# EAGLE board untitleda (EAGLE 8.3.1)
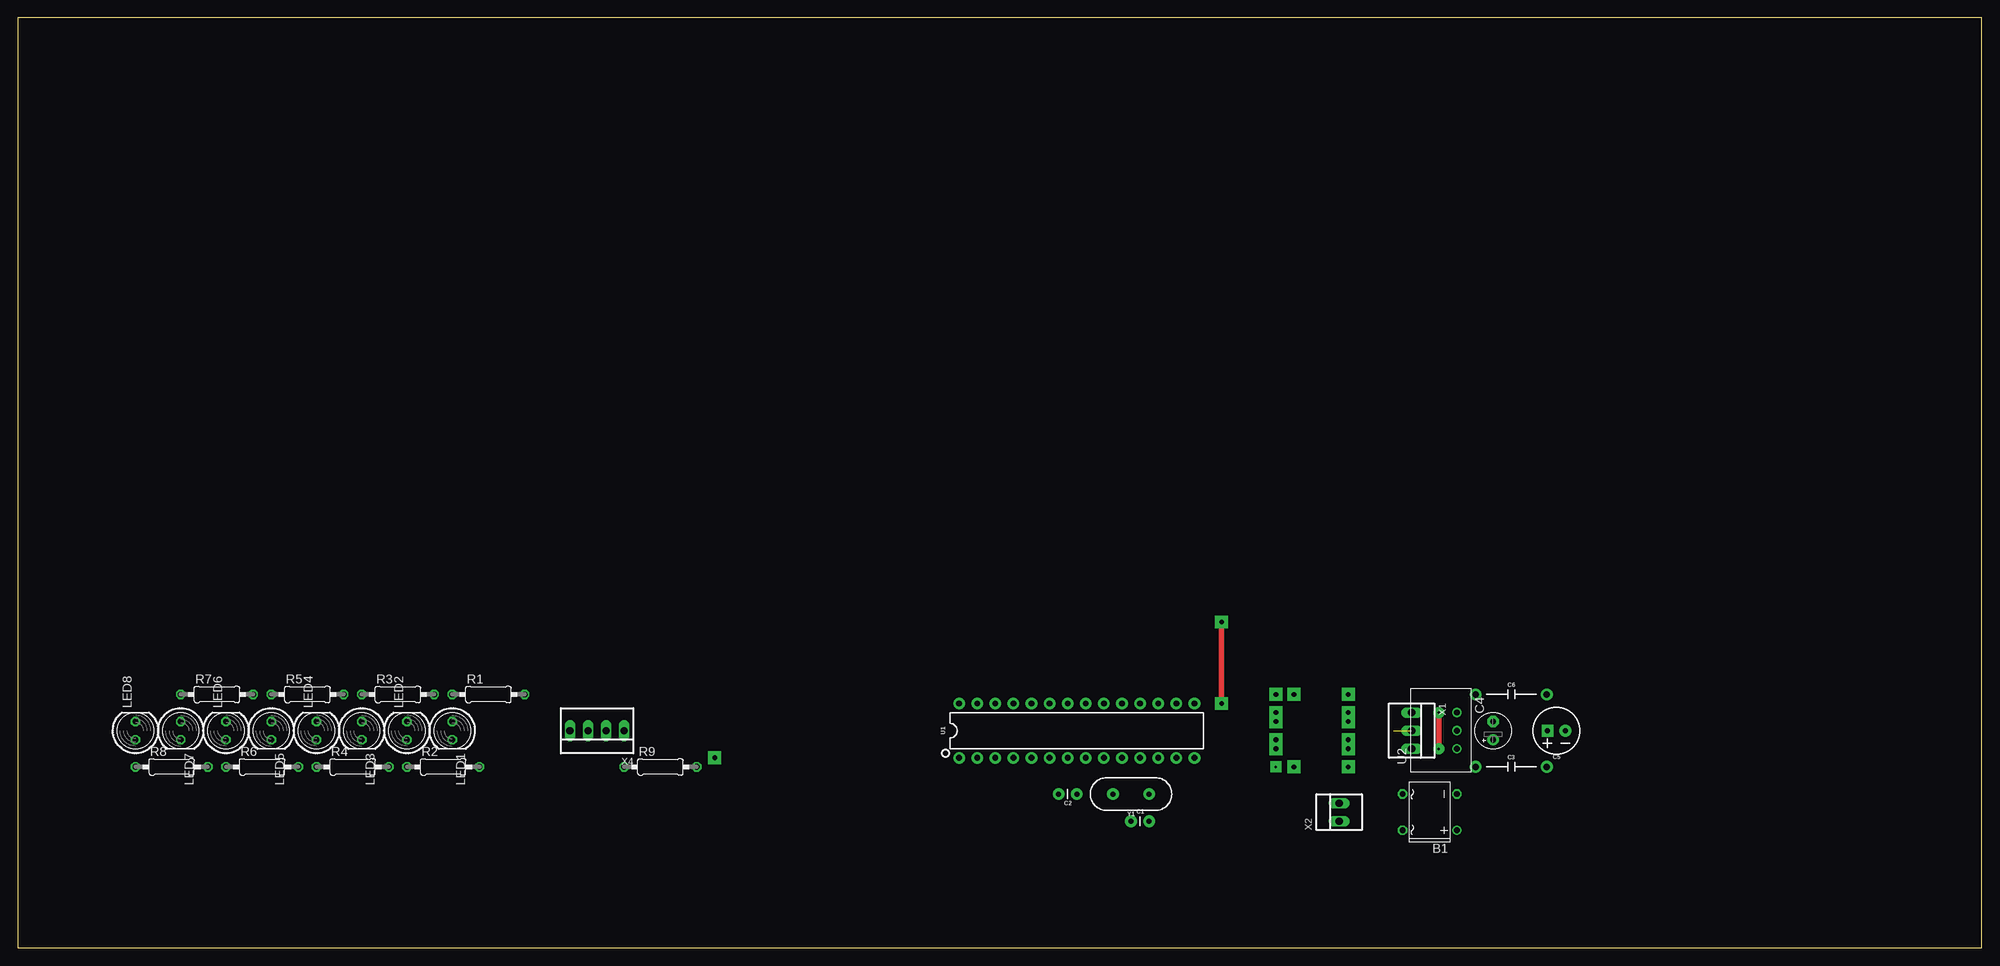
[diagram p0: board, top side]
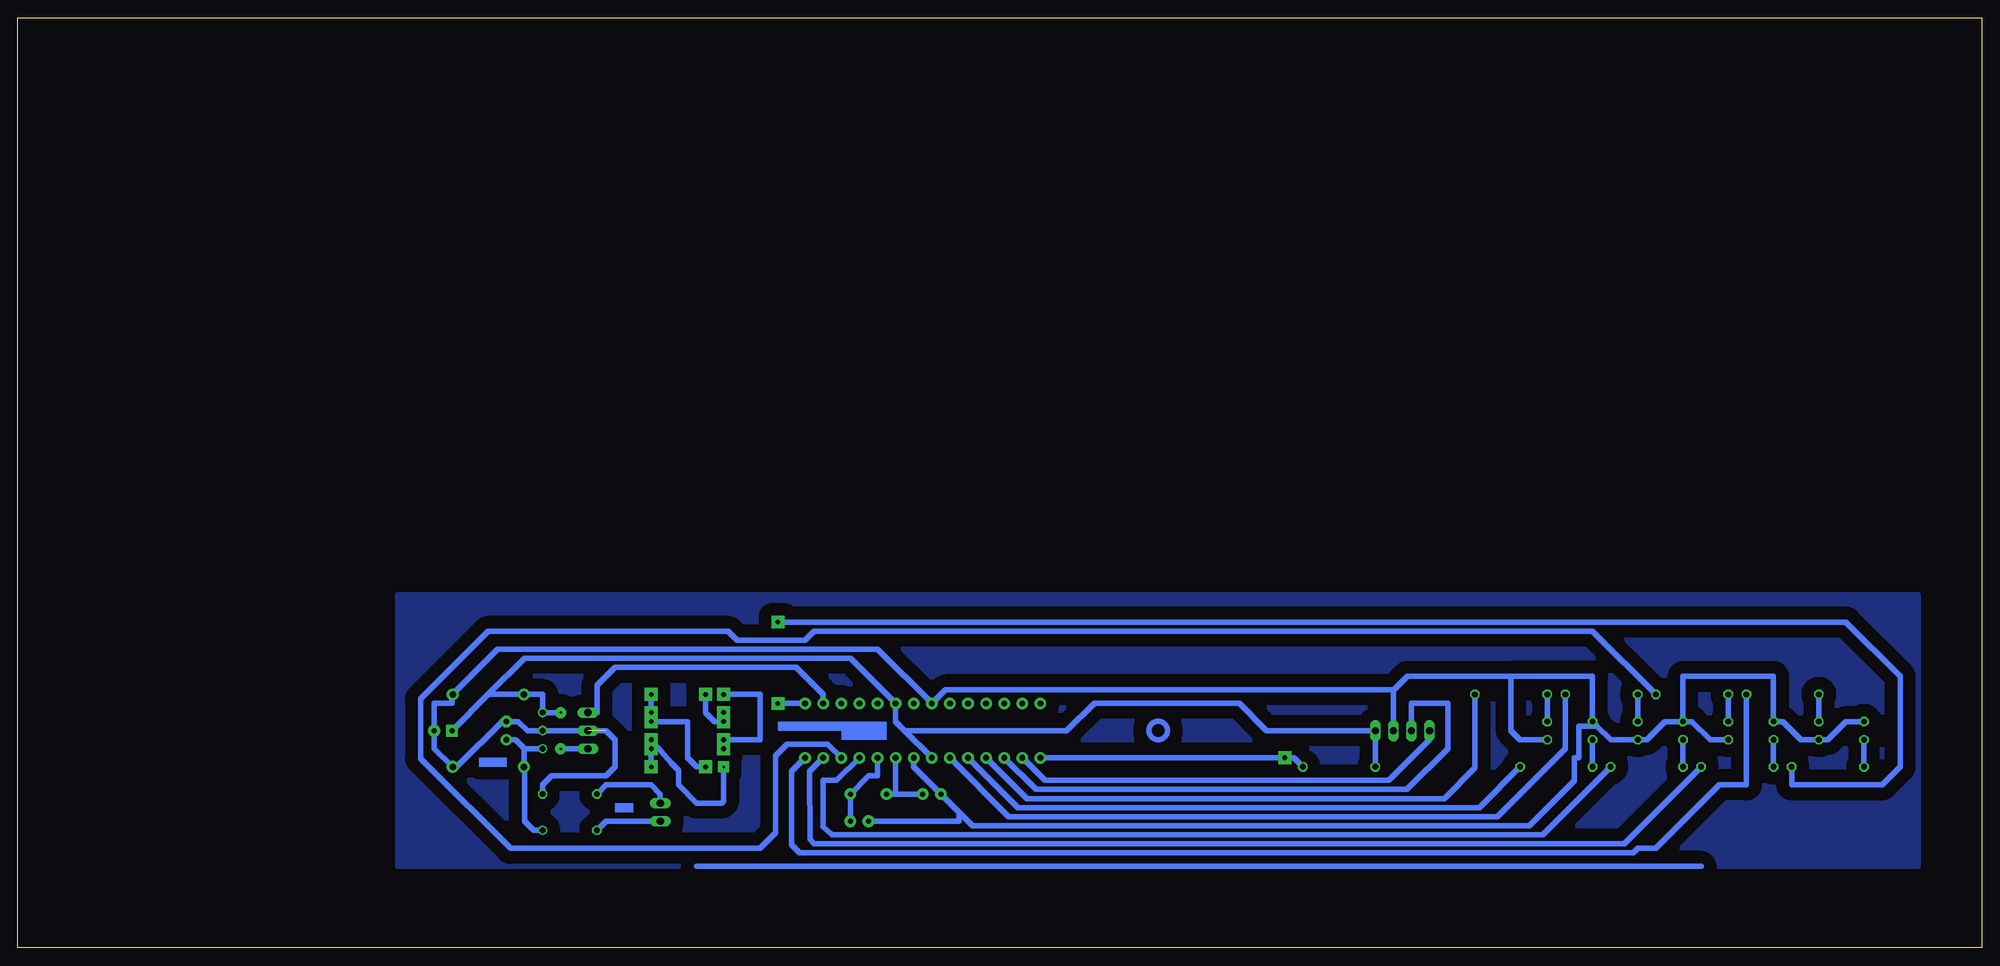
[diagram p1: board, bottom side, seen from below]

Size 275.57 x 130.48 mm. Coordinates in mm from the lower left corner, seen from the top.
Outline: 0,0 275.57,0 275.57,130.48 0,130.48 0,0
Copper layers (1*16): Top 0.035mm / dielectric 1.5mm / Bottom 0.035mm
Design rules "default *": minimum track width 30mil, minimum drill 0.35mm, track to track 20mil, track to pad 6mil, pad to pad 6mil, via to via 6mil, smd to smd 6mil, copper to edge 40mil, drill to drill 6mil, minimum pad ring 10mil, minimum via ring 8mil, stop-mask expansion 4mil, vias tented up to drill 0mil, thermal gap 10mil

## Footprints (pad centres in the part's own frame; a part is rotated, then mirrored left to right if it is on the bottom)
DB = drill 0.813: + -2.54,-3.81 | drill 0.813 octagon: - 2.54,-3.81; AC1 2.54,3.81; AC2 -2.54,3.81
CAP-PTH-2.54 = drill 0.7 pad 1.651: 1 -1.27,0; 2 1.27,0
CAP-PTH-10MM = drill 0.9 pad 1.651: 1 -5,0; 2 5,0
E2,5-5 = drill 0.813 pad 1.6: + -1.27,0 | drill 0.813 pad 1.6 octagon: - 1.27,0
CPOL-RADIAL-2.5MM-6.5MM = drill 0.7 pad 1.651 square: 1 1.25,0 | drill 0.7 pad 1.651: 2 -1.25,0
LED5MM = drill 0.813 octagon: A -1.27,0; K 1.27,0
0207/10 = drill 0.813 octagon: 1 -5.08,0; 2 5.08,0
DIP28 = drill 0.813 pad 1.626: 1 -16.51,-3.81; 2 -13.97,-3.81; 3 -11.43,-3.81; 4 -8.89,-3.81; 5 -6.35,-3.81; 6 -3.81,-3.81; 7 -1.27,-3.81; 8 1.27,-3.81; 9 3.81,-3.81; 10 6.35,-3.81; 11 8.89,-3.81; 12 11.43,-3.81; 13 13.97,-3.81; 14 16.51,-3.81; 15 16.51,3.81; 16 13.97,3.81; 17 11.43,3.81; 18 8.89,3.81; 19 6.35,3.81; 20 3.81,3.81; 21 1.27,3.81; 22 -1.27,3.81; 23 -3.81,3.81; 24 -6.35,3.81; 25 -8.89,3.81; 26 -11.43,3.81; 27 -13.97,3.81; 28 -16.51,3.81
DC-DC_CONVERTER_78XX = drill 0.8: GND 0,0; VIN -2.54,0; VOUT 2.54,0
22-23-2031 = drill 1 long: 1 -2.54,0; 2 0,0; 3 2.54,0
22-23-2021 = drill 1 long: 1 -1.27,0; 2 1.27,0
22-23-2041 = drill 1 long: 1 -3.81,0; 2 -1.27,0; 3 1.27,0; 4 3.81,0
HC49US = drill 0.7 pad 1.651: 1 -2.54,0; 2 2.54,0

## Placement (x,y rotation side)
B1  DBDB107G  [DB]  198.12,19.05 90 top
C1  22pF  [CAP-PTH-2.54]  157.48,17.78 0 top
C2  22pF  [CAP-PTH-2.54]  147.32,21.59 180 top
C3  10nF  [CAP-PTH-10MM]  209.55,25.4 0 top
C4  [E2,5-5]  207.01,30.48 90 top
C5  100uF  [CPOL-RADIAL-2.5MM-6.5MM]  215.9,30.48 180 top
C6  10nF  [CAP-PTH-10MM]  209.55,35.56 0 top
LED1  [LED5MM]  60.96,30.48 270 top
LED2  [LED5MM]  54.61,30.48 90 top
LED3  [LED5MM]  48.26,30.48 270 top
LED4  [LED5MM]  41.91,30.48 90 top
LED5  [LED5MM]  35.56,30.48 270 top
LED6  [LED5MM]  29.21,30.48 90 top
LED7  [LED5MM]  22.86,30.48 270 top
LED8  [LED5MM]  16.51,30.48 90 top
R1  [0207/10]  66.04,35.56 0 top
R2  [0207/10]  59.69,25.4 0 top
R3  [0207/10]  53.34,35.56 0 top
R4  [0207/10]  46.99,25.4 0 top
R5  [0207/10]  40.64,35.56 0 top
R6  [0207/10]  34.29,25.4 0 top
R7  [0207/10]  27.94,35.56 0 top
R8  [0207/10]  21.59,25.4 0 top
R9  [0207/10]  90.17,25.4 0 top
U1  328P  [DIP28]  148.59,30.48 0 top
U2  R-78E5.0-1.0  [DC-DC_CONVERTER_78XX]  201.93,30.48 90 top
X1  22-23-2031  [22-23-2031]  195.58,30.48 270 top
X2  22-23-2021  [22-23-2021]  185.42,19.05 90 top
X4  22-23-2041  [22-23-2041]  81.28,30.48 180 top
Y1  16MHz  [HC49US]  156.21,21.59 180 top

## Library data of the parts
B1 = rectifier
C1 C2 = SparkFun-Capacitors; PROD_ID: CAP-09128
C3 C6 = SparkFun-Capacitors; PROD_ID: CAP-09321
C4 R1-R9 = resistor
C5 = SparkFun-Capacitors; PROD_ID: CAP-08439
LED1-LED8 = led
U1 = SparkFun-IC-Microcontroller; PROD_ID: IC-09136
U2 = SparkFun-IC-Power; PROD_ID: COM-13655
X1 = con-molex; MF: MOLEX; MPN: 22-23-2031; OC_FARNELL: 1462950; OC_NEWARK: 30C0862
X2 = con-molex; MF: MOLEX; MPN: 22-23-2021; OC_FARNELL: 1462926; OC_NEWARK: 25C3832
X4 = con-molex; MF: MOLEX; MPN: 22-23-2041; OC_FARNELL: 1462920; OC_NEWARK: 38C0355
Y1 = SparkFun-Clocks; PROD_ID: XTAL-08181; SF_ID: COM-00536

## Nets
2: R1.2 U1.4
3: R2.2 U1.5
4: R3.2 U1.6
5: R4.2 U1.11
5V: C5.1 C6.1 R9.1 U1.7 U1.20 U2.VOUT X1.3 X4.1
6: R5.2 U1.12
7: R6.2 U1.13
8: R7.2 U1.14
9: R8.2 U1.15
N$1: LED1.A R1.1
N$2: LED2.A R2.1
N$3: LED3.A R3.1
N$4: LED4.A R4.1
N$5: LED5.A R5.1
N$6: LED6.A R6.1
N$7: LED7.A R7.1
N$8: LED8.A R8.1
N$9: C1.2 U1.10 Y1.1
N$10: B1.+ C3.1 C4.+ U2.VIN
N$11: B1.AC2 X2.1
N$12: U1.2 X4.4
N$13: U1.3 X4.3
N$14: B1.AC1 X2.2
N$15: R9.2 U1.1
N$16: B1.- C1.1 C2.2 C3.2 C4.- C5.2 C6.2 LED1.K LED2.K LED3.K LED4.K LED5.K LED6.K LED7.K LED8.K U1.8 U1.22 U2.GND X1.2 X4.2
N$21: U1.16 X1.1
N$23: C2.1 U1.9 Y1.2

## Tracks (layer width: path | path; a pad name or v marks a point on that pad's centre or on a via)
2
  Bottom 0.762: U1.4 133.98,20.95 75.41,20.95 71.12,25.24 R1.2
3
  Bottom 0.762: R2.2 70.48,19.69 135.25,19.69 U1.5
4
  Bottom 0.762: U1.6 136.52,18.41 67.94,18.41 58.42,27.94 R3.2
5
  Bottom 0.762: R4.2 61.59,15.88 161.29,15.88 162.55,17 162.56,23.5 160.66,23.5 U1.11
5V  (via drill 0.35 pad 1.55)
  Top 0.762: v199.39,33.02 v199.39,27.94
  Bottom 0.762: 209.55,35.56 214.63,30.48 C5.1 | 209.55,35.56 C6.1 201.93,35.56 U2.VOUT v199.39,33.02 | R9.1 X4.1 100.33,30.48 104.14,34.29 124.46,34.29 128.41,30.48 151.15,30.5 | 151.15,30.5 152.4,31.75 U1.20 158.75,40.64 204.47,40.64 209.55,35.56 | U1.7 151.15,30.5 | X1.3 v199.39,27.94
6
  Bottom 0.762: U1.12 161.92,28.57 167.64,28.57 169.23,26.99 169.23,16.19 171.45,13.97 206.45,13.97 218.28,25.8 219.07,26.57 219.07,34.92 209.59,44.41 175.88,44.41 174.66,43.18 165.1,43.18 163.83,44.45 54.61,44.45 R5.2
7
  Bottom 0.762: R6.2 50.16,14.61 163.83,14.61 164.44,15.21 164.47,24.77 U1.13
8
  Bottom 0.762: R7.2 33.02,22.86 36.83,22.86 45.72,13.97 48.26,13.97 48.89,13.34 165.86,13.34 167.01,14.48 167.01,24.77 U1.14
9  (via drill 0.65 pad 1.81)
  Top 0.762: v168.91,45.72 v168.91,34.29
  Bottom 0.762: R8.2 26.67,22.86 13.97,22.86 11.43,25.4 11.43,38.1 19.05,45.72 v168.91,45.72 | U1.15 v168.91,34.29
N$1
  Bottom 0.762: R1.1 LED1.A
N$2
  Bottom 0.762: LED2.A R2.1
N$3
  Bottom 0.762: R3.1 LED3.A
N$4
  Bottom 0.762: LED4.A R4.1
N$5
  Bottom 0.762: R5.1 LED5.A
N$6
  Bottom 0.762: LED6.A R6.1
N$7
  Bottom 0.762: R7.1 LED7.A
N$8
  Bottom 0.762: LED8.A R8.1
N$9
  Bottom 0.762: C1.2 Y1.1 156.21,24.13 154.94,24.13 U1.10
N$10
  Bottom 0.762: U2.VIN 204.47,27.94 204.51,27.98 | 204.51,27.98 205.74,29.21 C4.+ | 204.51,27.98 204.55,27.94 C3.1 204.47,25.32 204.47,17.78 203.2,16.51 B1.+
N$11
  Bottom 0.762: X2.1 193.04,17.78 B1.AC2
N$12
  Bottom 0.762: U1.2 131.44,23.5 83.19,23.5 77.47,29.21 X4.4
N$13
  Bottom 0.762: U1.3 132.72,22.23 80.64,22.23 74.93,27.94 74.93,34.29 80.01,34.29 X4.3
N$14
  Bottom 0.762: X2.2 185.42,21.59 186.69,22.86 193.04,22.86 B1.AC1
N$15  (via drill 0.65 pad 1.81)
  Bottom 0.762: R9.2 96.52,26.67 v97.79,26.67 U1.1
N$16  (1 unrouted)
  Bottom 0.762: U1.8 149.86,25.4 C2.2 143.51,19.05 | 53.97,31.12 52.07,29.21 LED3.K 46.99,29.21 44.45,31.75 LED4.K | 82.55,36.15 82.55,36.2 145.41,36.2 U1.22 154.94,41.91 208.25,41.91 211.99,38.17 C6.2 214.63,34.29 217.17,34.29 C5.2 217.17,27.94 C3.2 214,25.4 207.64,31.75 C4.- 205.33,31.75 204.06,30.48 U2.GND 193.04,30.48 191.77,29.21 191.77,25.4 193.04,24.13 200.66,24.13 201.93,22.86 B1.- | 82.55,36.15 X4.2 | 53.97,31.12 LED2.K 54.61,38.1 66.1,38.1 | LED5.K 38.1,29.21 40.64,31.75 LED4.K | LED8.K 19.05,31.75 21.59,29.21 LED7.K 25.4,29.21 27.94,31.75 LED6.K 29.21,38.1 41.91,38.1 LED4.K | 66.1,38.1 80.6,38.1 82.55,36.15 | LED1.K 64.77,29.21 66.04,30.48 66.1,38.1 | 53.97,31.12 56.51,31.12 56.54,26.67 57.15,26.67 57.18,23.47 63.5,17.14 141.6,17.14 143.51,19.05 | C1.1 143.51,17.78 143.51,19.05
N$17  (via drill 0.65 pad 1.81)
  Bottom 0.762: v176.53,31.75 177.8,31.75 179.07,33.02 v179.07,35.56
N$18  (via drill 0.65 pad 1.81)
  Bottom 0.762: 172.72,29.21 v176.53,29.21
N$19
  pour Bottom (isolate 1.778): 8.89,49.53 8.89,11.43 222.25,11.43 222.25,49.53
N$20
  Bottom 0.762: 39.37,11.43 53.34,11.43 176.53,11.43 180.34,11.43
N$21
  Bottom 0.762: U1.16 162.56,35.56 166.37,39.37 191.77,39.37 194.31,36.83 194.31,33.02 X1.1
N$22  (via drill 0.65 pad 1.81)
  Bottom 0.762: 172.68,29.21 171.45,29.21 171.45,35.56 v176.53,35.56
N$23
  Bottom 0.762: Y1.2 152.4,21.59 | 152.4,21.59 C2.1 | 152.4,21.59 U1.9
N$25  (via drill 0.35 pad 1.55, 0.65 pad 1.81)
  Bottom 0.762: v186.69,25.4 v186.69,27.94 v186.69,29.21 183.9,25.96 182.88,24.94 182.88,22.86 180.34,20.32 176.8,20.32 176.53,20.59 v176.53,25.4
N$26  (via drill 0.65 pad 1.81)
  Bottom 0.762: v186.69,35.56 v186.69,33.02 v186.69,31.75 181.61,31.75 181.61,26.67 180.34,25.4 v179.07,25.4
S$1  (via drill 0.65 pad 1.81)
  other vias: 176.53,27.94
S$2  (via drill 0.65 pad 1.81)
  other vias: 176.53,33.02
(copper drawn outside any net)
  shapes: Bottom area x4, Bottom circle x1